# Altium PCB V1.pcbdoc
Units mil, origin at the board's own origin, x right, y up, seen from the top; angles counter-clockwise.
Board outline 2300.07 x 2074.8 mil, 2 copper layers (Top Layer, Bottom Layer); 52 components, 63 nets, 167 pads, 18 vias.
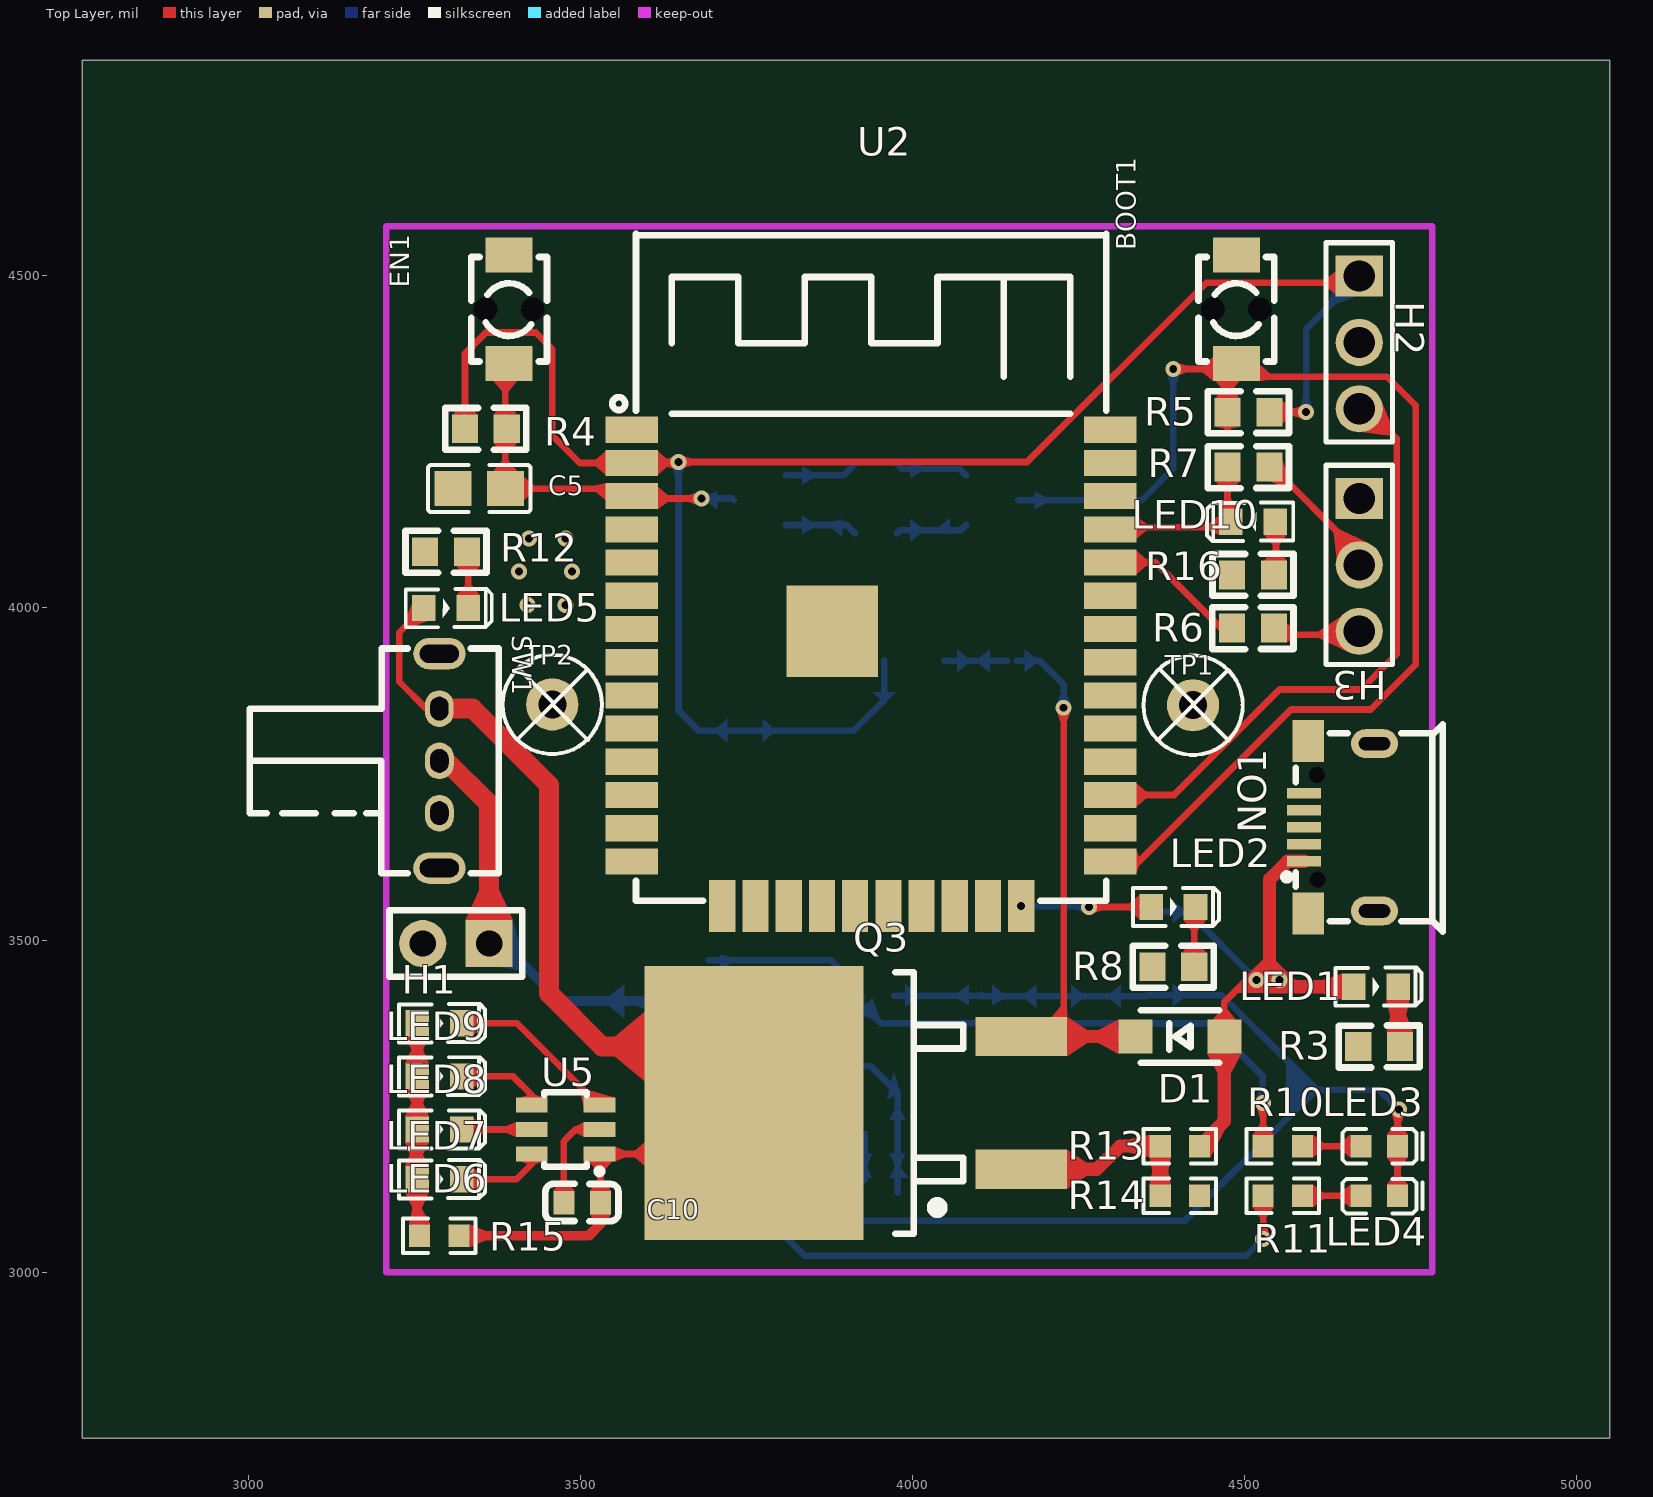
[diagram p0: Top Layer view]
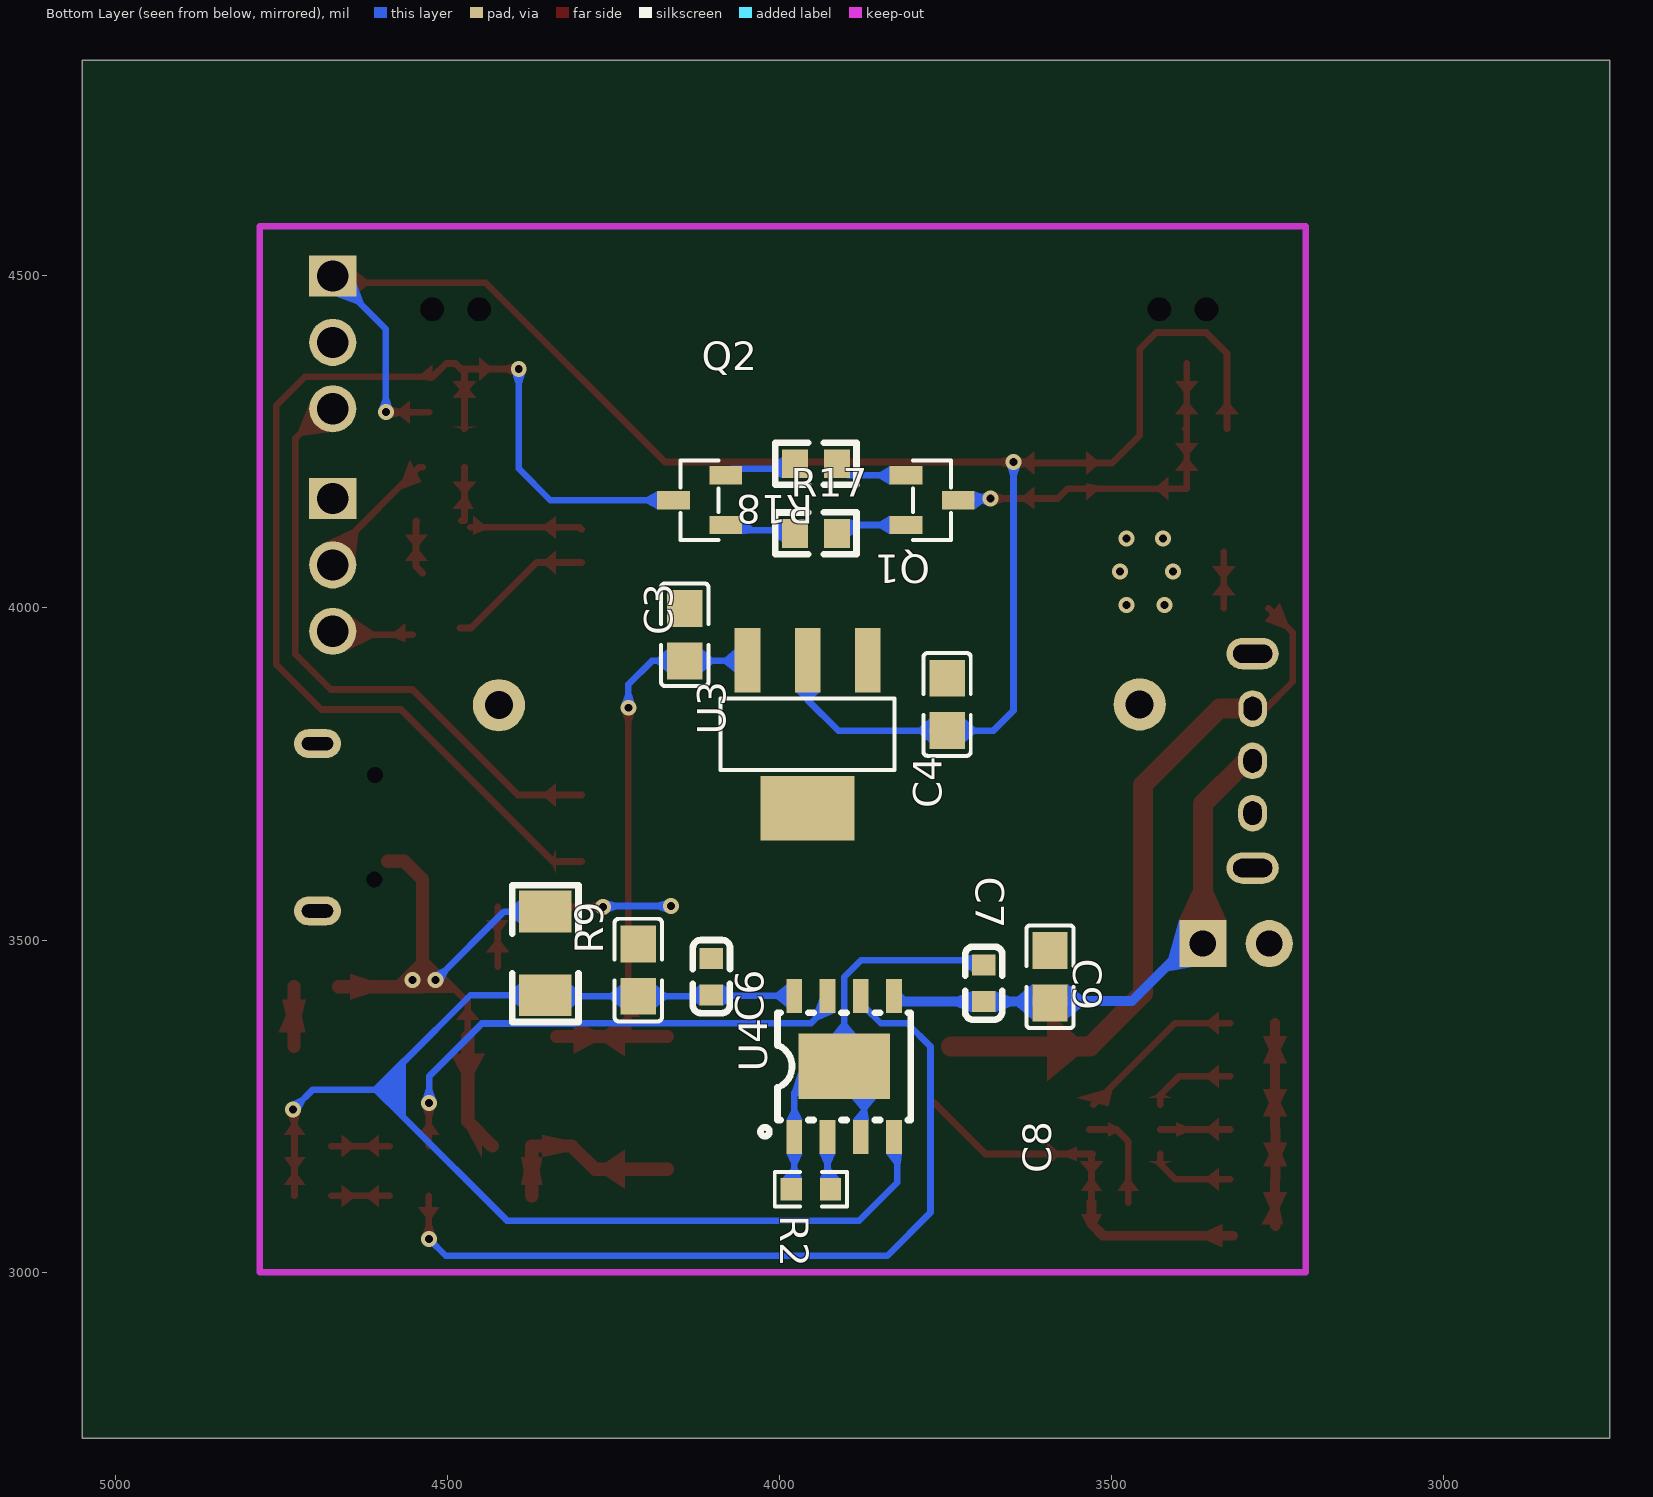
[diagram p1: Bottom Layer view, seen from below]

## Layer stack, top to bottom
Top Layer: signal copper (thickness not stored)
Dielectric: dielectric 12.6, FR-4, Dk 4.8
Bottom Layer: signal copper (thickness not stored)

## Board outline
5050.07,2750 2750,2750 2750,4824.8 5050.07,4824.8

## Components (designator, comment, footprint, x,y, rotation, side; value= is the part's Value field where it differs from the comment)
BOOT1 "TSA343G00D-250J2" SW-SMD_L4.0-W2.9-P4.15-EH 4487.79,4449.8 r90 top
C3 "10uF" C0805 4142.79,3959.8 r90 bottom
C4 "10uF" C0805 3747.79,3854.8 r90 bottom
C5 "10uF" C0805 3347.79,4179.8 r0 top
C6 "104" C0603 4102.79,3444.8 r270 bottom
C7 "104" C0603 3692.79,3434.8 r270 bottom
C8 "10UF" C0805 4212.79,3454.8 r270 bottom
C9 "10UF" C0805 3592.79,3444.8 r270 bottom
C10 "1uF" C0603 3502.79,3104.8 r0 top
D1 "1N4148W" SOD-123FL_L2.6-W1.6-LS3.4-RD 4402.79,3354.8 r180 top
EN1 "TSA343G00D-250J2" SW-SMD_L4.0-W2.9-P4.15-EH 3392.79,4449.8 r90 top
H1 "电源端口" HDR-TH_2P-P2.54-V-M-1 3312.79,3494.8 r180 top
H2 "Z-211-0311-0021-001" HDR-TH_3P-P2.54-V-M-1 4672.79,4399.8 r270 top
H3 "Z-211-0311-0021-001" HDR-TH_3P-P2.54-V-M-1 4672.79,4064.8 r270 top
LED1 "LED-0603_R" LED0603_RED 4697.79,3429.8 r0 top
LED2 "LED-0603_R" LED0603_RED 4392.79,3549.8 r0 top
LED3 "红色" L0603-RD 4702.79,3189.8 r180 top
LED4 "绿色" L0603-RD 4702.79,3114.8 r180 top
LED5 "LED-0603_R" LED0603_RED 3297.79,3999.8 r0 top
LED6 "LED-0603_R" LED0603_RED 3287.79,3139.8 r0 top
LED7 "LED-0603_R" LED0603_RED 3287.79,3214.8 r0 top
LED8 "LED-0603_R" LED0603_RED 3287.79,3294.8 r0 top
LED9 "LED-0603_R" LED0603_RED 3287.79,3374.8 r0 top
LED10 "LED-0603_R" LED0603_RED 4512.79,4129.8 r180 top
NO1 "MICROUSB-5PIN" USB-SMD_5P_MICROUSB-5PIN 4642.79,3669.8 r90 top
Q1 "S8050" SOT-23-3_L2.9-W1.3-P1.90-LS2.4-BR 3770.29,4162.3 r0 bottom
Q2 "S8050" SOT-23-3_L2.9-W1.3-P1.90-LS2.4-BR 4120.29,4162.3 r180 bottom
Q3 "IRF5210" TO-263-2_L10.0-W9.1-P5.08-LS15.2-BR 3962.79,3254.8 r0 top
R2 "1.2K" R0603#1 3952.79,3124.8 r180 bottom
R3 "1k" R0603#2 4702.79,3339.8 r180 top
R4 "10k" R0603#2 3357.79,4269.8 r180 top
R5 "10k" R0603#2 4505.96,4294.8 r0 top
R6 "120" R0603#2 4512.79,3969.8 r180 top
R7 "120" R0603#2 4505.99,4212.12 r180 top
R8 "1k" R0603#2 4392.82,3460 r180 top
R9 "250mR" R1206_1 4352.79,3479.8 r270 bottom
R10 "2K" R0603#1 4557.79,3189.8 r0 top
R11 "10k" R0603#1 4557.79,3114.8 r0 top
R12 "1k" R0603#2 3297.79,4084.8 r180 top
R13 "1k" R0603#1 4402.79,3189.8 r180 top
R14 "1k" R0603#1 4402.79,3114.8 r0 top
R15 "330" R0603#1 3287.79,3054.8 r180 top
R16 "1k" R0603#2 4512.79,4049.8 r0 top
R17 "10k" R0603#2 3945.29,4112.3 r180 bottom
R18 "10k" R0603#2 3945.29,4217.3 r0 bottom
SW1 "SK-12D02-VG5_C136722" SW-TH_SK-12D02-VG5 3287.79,3769.8 r270 top
TP1 "M2螺丝" M2螺丝 4422.6,3853.66 r0 top
TP2 "M2螺丝" M2螺丝 3457.79,3854.8 r0 top
U2 "ESP32-WROVER" COMM-SMD_ESP-WROOM-32D 3937.79,3909.8 r0 top
U3 "AMS1117-3.3_C347256" SOT-223-4_L6.5-W3.5-P2.30-LS7.0-BR 3957.79,3809.8 r90 bottom
U4 "TP4056D" ESOP-8_L4.9-W3.9-P1.27-LS6.0-TL-EP 3902.79,3309.8 r90 bottom
U5 "HM1160" SOT23-6 3477.79,3214.8 r90 top

## Footprints (in the part's own frame and the unit in brackets; to place one, negate y for a bottom-side part, rotate by r counter-clockwise, add the part's x,y. Pads: shape width x height; smd on the part's side, far side on the other; paste and mask are expansions set on the pad)
C0603 [mm]
  rect 0.8x0.9 smd paste+0 mask+0.051: 1(-0.7,0) 2(0.7,0)
  silkscreen extent -1.41,-0.71 1.39,0.72
C0805 [mm]
  rect 1.41x1.35 smd paste-100 mask+0.051: 1(-1,0) 2(1,0)
  silkscreen extent -1.96,-0.9 1.96,0.9
COMM-SMD_ESP-WROOM-32D [mm]
  rect 2x1.001 smd paste+0 mask+0.05: 1(-9.15,9.108) 2(-9.15,7.838) 3(-9.15,6.568) 4(-9.15,5.298) 5(-9.15,4.028) 6(-9.15,2.758) 7(-9.15,1.488) 8(-9.15,0.218) 9(-9.15,-1.052) 10(-9.15,-2.322) 11(-9.15,-3.592) 12(-9.15,-4.862) 13(-9.15,-6.132) 14(-9.15,-7.402) 25(9.15,-7.402) 26(9.15,-6.132) 27(9.15,-4.862) 28(9.15,-3.592) 29(9.15,-2.322) 30(9.15,-1.052) 31(9.15,0.218) 32(9.15,1.488) 33(9.15,2.758) 34(9.15,4.028) 35(9.15,5.298) 36(9.15,6.568) 37(9.15,7.838) 38(9.15,9.108)
  rect 1.001x2 smd paste+0 mask+0.05: 15(-5.69,-9.108) 16(-4.42,-9.108) 17(-3.15,-9.108) 18(-1.88,-9.108) 19(-0.61,-9.108) 20(0.66,-9.108) 21(1.93,-9.108) 22(3.2,-9.108) 23(4.47,-9.108) 24(5.74,-9.108)
  rect 3.5x3.5 smd paste+0 mask+0.05: 39(-1.491,1.399)
  silkscreen extent -9.9,-8.9 8.99,16.6
ESOP-8_L4.9-W3.9-P1.27-LS6.0-TL-EP [mm]
  rect 1.3x0.6 smd paste+0 mask+0.051: 1(-2.7,1.905) 2(-2.7,0.635) 3(-2.7,-0.635) 4(-2.7,-1.905) 5(2.7,-1.905) 6(2.7,-0.635) 7(2.7,0.635) 8(2.7,1.905)
  rect 2.5x3.5 smd paste+0 mask+0.051: 9(0,0)
  silkscreen extent -2.67,-2.55 2.05,3.2
HDR-TH_2P-P2.54-V-M-1 [mm]
  rect 1.8x1.8 hole 1 paste+0 mask+0.051: 1(-1.27,0)
  round 1.8 hole 1 paste+0 mask+0.051: 2(1.27,0)
  silkscreen extent -2.54,-1.27 2.54,1.27
HDR-TH_3P-P2.54-V-M-1 [mm]
  rect 1.575x1.8 hole 1.2 paste+0 mask+0.051: 1(-2.54,0)
  round 1.8 hole 1.2 paste+0 mask+0.051: 2(0,0) 3(2.54,0)
  silkscreen extent -3.81,-1.27 3.81,1.27
L0603-RD [mm]
  rect 0.8x0.864 smd paste-100 mask+0.051: 1(-0.7,0) 2(0.7,0)
  silkscreen extent -1.65,-0.65 1.41,0.67
LED0603_RED [mm]
  rect 0.9x1 smd paste+0 mask+0.051: 1(-0.85,0) 2(0.85,0)
  silkscreen extent -1.54,-0.73 1.75,0.73
M2螺丝 [mm]
  round 2 hole 1.07 mask+0.051: 1(0,0)
  silkscreen extent -1.9,-1.9 1.9,1.9
R0603#1 [mil]
  rect 31.75x34.02 smd paste-3937.01 mask+2: 1(-29.66,0) 2(29.66,0)
  silkscreen extent -55,-26 55,26
R0603#2 [mil]
  rect 39.37x43.31 smd paste+0 mask+4: 1(-31.49,0) 2(31.5,0)
  silkscreen extent -61,-31 61,32
R1206_1 [mil]
  rect 63x78.74 smd paste+0 mask+1.97: 1(-62.99,0) 2(62.99,0)
  silkscreen extent -103,-50 103,50
SOD-123FL_L2.6-W1.6-LS3.4-RD [mm]
  rect 1.3x1.3 smd paste+0 mask+0.051: 1(1.7,0) 2(-1.7,0)
  silkscreen extent -1.5,-1 1.5,1
SOT23-6 [mil]
  rect 22.2x47.7 smd paste+0 mask+2: 1(-37,-51) 2(0,-51) 3(37,-51) 4(37,51) 5(0,51) 6(-37,51)
  silkscreen extent -67,-55 56,32
SOT-23-3_L2.9-W1.3-P1.90-LS2.4-BR [mm]
  rect 1.25x0.7 smd paste+0 mask+0.051: 1(1,-0.95) 2(1,0.95) 3(-1,0)
  silkscreen extent -0.73,-1.53 0.73,1.53
SOT-223-4_L6.5-W3.5-P2.30-LS7.0-BR [mm]
  rect 2.47x0.98 smd paste+0 mask+0.051: 1(2.835,-2.3) 2(2.835,0) 3(2.835,2.3)
  rect 2.47x3.6 smd paste+0 mask+0.051: 4(-2.835,0)
  silkscreen extent -1.37,-3.33 1.37,3.33
SW-SMD_L4.0-W2.9-P4.15-EH [mm]
  rect 1.35x1.8 smd paste+0 mask+0.051: 1(-2.075,0) 2(2.075,0)
  Multi-Layer board cut-out: 0,0.45 0.195,0.494 0.352,0.619 0.439,0.8 0.439,1 0.352,1.18 0.195,1.305 0,1.35 0,1.35 -0.195,1.305 -0.352,1.18 -0.439,1 -0.439,0.8 -0.352,0.619 -0.195,0.494 0,0.45
  Multi-Layer board cut-out: 0,-1.35 0.195,-1.305 0.352,-1.18 0.439,-1 0.439,-0.8 0.352,-0.619 0.195,-0.494 0,-0.45 0,-0.45 -0.195,-0.494 -0.352,-0.619 -0.439,-0.8 -0.439,-1 -0.352,-1.18 -0.195,-1.305 0,-1.35
  silkscreen extent -2,-1.45 2,1.45
SW-TH_SK-12D02-VG5 [mm]
  oval 1.4x1.1 hole 0.7 slot 0.9 at 0 deg copper offset 0.001,0 paste+0 mask+0.051: 1(-2,-0.001)
  oval 1.4x1.1 hole 0.7 slot 0.9 at 0 deg paste+0 mask+0.051: 2(0,0)
  oval 1.4x1.1 hole 0.7 slot 0.9 at 0 deg copper offset -0.001,0 paste+0 mask+0.051: 3(2,0.001)
  oval 1.2x2 hole 0.7 slot 1.5 at 90 deg copper offset 0,-0.001 paste+0 mask+0.051: 4(4.099,0)
  oval 1.2x2 hole 0.7 slot 1.5 at 90 deg copper offset 0,0 paste+0 mask+0.051: 5(-4.1,0)
  silkscreen extent -4.3,-7.25 4.3,2.27
TO-263-2_L10.0-W9.1-P5.08-LS15.2-BR [mm]
  rect 3.504x1.5 smd paste+0 mask+0.102: 1(5.106,-2.54) 3(5.106,2.54)
  rect 8.38x10.49 smd paste+0 mask+0.102: 4(-5.106,0)
  silkscreen extent 0.29,-5 2.89,5
USB-SMD_5P_MICROUSB-5PIN [mm]
  rect 0.4x1.3 smd paste-100 mask+0.05: 1(-1.3,1.345) 2(-0.65,1.345) 3(0,1.345) 4(0.65,1.345) 5(1.3,1.345)
  rect 1.6x1.2 smd paste-100 mask+0.05: 6(3.3,1.185) 7(-3.3,1.185)
  oval 1.1x1.8 hole 0.5 slot 1.2 at 90 deg paste+0 mask+0.05: 8(3.2,-1.345) 9(-3.2,-1.345)
  Multi-Layer board cut-out: 2,0.555 2.13,0.585 2.235,0.668 2.292,0.788 2.292,0.922 2.235,1.042 2.13,1.125 2,1.155 2,1.155 1.87,1.125 1.765,1.042 1.708,0.922 1.708,0.788 1.765,0.668 1.87,0.585 2,0.555
  Multi-Layer board cut-out: -2,0.525 -1.87,0.555 -1.765,0.638 -1.708,0.758 -1.708,0.892 -1.765,1.012 -1.87,1.095 -2,1.125 -2,1.125 -2.13,1.095 -2.235,1.012 -2.292,0.892 -2.292,0.758 -2.235,0.638 -2.13,0.555 -2,0.525
  silkscreen extent -3.99,-3.96 3.93,2.14

## Via types
v1: diameter 24, hole 12, Top Layer to Bottom Layer, 18 vias

## Nets (pads, with @x,y where several pads share a name; then routed paths per layer and width w, separated by ;. In a path a pad name is that pad's centre, name@x,y a point inside that pad or via, vN(x,y) a via of type N, cw(c..) or ccw(c..) an arc to the next point about the centre after c; other vN are vias at no path point)
3V3: C4.1 H2.1 R4.2 R5.2 U2.2 U3.2 | length 2826.4
  Top Layer w10: R4.2 3326.29,4383.31 3357.79,4414.8 3432.79,4414.8 3457.79,4389.8 3457.79,4259.8 3499.2,4218.39 U2.2 3646.38,4218.39 v1(3647.79,4219.8) 4172.79,4219.8 4442.79,4489.8 4662.79,4489.8 H2.1 ; R5.2@4527.46,4294.81 v1(4592.79,4294.8)
  Bottom Layer w10: v1(3647.79,4219.8) 3647.79,3845.43 3677.79,3815.43 C4.1 3911.81,3815.43 3957.79,3861.41 U3.2 ; v1(4592.79,4294.8) 4592.79,4419.8 H2.1
$1N349: R2.2 U4.2 | length 90.3
  Bottom Layer w10: R2.2@3912.79,3124.46 3927.79,3139.46 U4.2@3927.79,3208.51
$1N379: R10.1 U4.7 | length 767
  Top Layer w10: v1(4527.79,3254.8) 4528.13,3254.46 R10.1
  Bottom Layer w10: U4.7@3922.79,3416.1 3922.79,3404.8 3952.79,3374.8 4308.37,3374.8 4308.86,3374.31 4448.28,3374.31 4527.79,3294.8 v1(4527.79,3254.8)
$1N380: R11.1 U4.6 | length 1248.6
  Top Layer w10: v1(4527.79,3049.8) 4528.13,3050.14 R11.1
  Bottom Layer w10: U4.6@3872.79,3416.1 3872.79,3399.8 3847.79,3374.8 3807.79,3374.8 3772.79,3339.8 3772.79,3089.8 3837.79,3024.8 4502.79,3024.8 v1(4527.79,3049.8)
$1N662: Q3.1 R13.2 R14.1 | length 293.8
  Top Layer w20: Q3.1@4168.83,3154.8 4277.79,3154.8 4312.79,3189.8 R13.2 R14.1
$1N691: LED9.2 U5.3 | length 257.5
  Top Layer w10: LED9.2 3404.8,3374.8 U5.3@3527.79,3251.81
$1N692: LED8.2 U5.4 | length 132.1
  Top Layer w10: LED8.2 3398.79,3294.8 3426.79,3266.81 U5.4
$1N693: LED7.2 U5.5 | length 105.5
  Top Layer w10: LED7.2 U5.5
$1N694: LED6.2 U5.6 | length 130.1
  Top Layer w10: LED6.2 3403.78,3139.8 3426.79,3162.81 U5.6
$1N695: LED6.1 LED7.1 LED8.1 LED9.1 R15.2 | length 306.5
  Top Layer w15: R15.2@3253.13,3069.8 3254.32,3070.99 LED6.1 3253.13,3140.99 LED7.1@3253.13,3214.8 ; LED7.1@3253.13,3215.99 LED7.1 ; LED7.1@3254.32,3215.99 LED8.1 LED9.1
$1N772: H3.3 R6.1 | length 122.4
  Top Layer w10: R6.1@4552.48,3959.8 4667.79,3959.8 H3.3
$1N773: H3.2 R7.1 | length 243.9
  Top Layer w10: R7.1 4542.48,4212.11 4663.44,4091.16 H3.2@4663.44,4086.16 ; H3.2@4663.44,4086.16 4663.44,4074.16 H3.2 4680.17,4064.8 4682.48,4067.11 H3.2@4663.44,4086.16
$1N829: LED10.1 R16.2 | length 83.7
  Top Layer w10: R16.2@4537.46,4052.49 4547.46,4062.49 4547.46,4130.38 LED10.1@4546.26,4131.57
$1N937: LED3.2 R10.2 | length 87.8
  Top Layer w10: R10.2 LED3.2
$1N938: LED4.2 R11.2 | length 87.8
  Top Layer w10: R11.2 LED4.2
$1N941: LED5.2 R12.1 | length 85
  Top Layer w10: LED5.2 R12.1@3331.25,4084.8
$1N948: Q2.1 R17.1 | length 109.4
  Bottom Layer w10: R17.1 3981.78,4117.31 4073.32,4117.31 Q2.1
$1N949: Q1.1 R18.1 | length 111.4
  Bottom Layer w10: Q1.1 3896.2,4199.7 R18.1
$1N2531: LED2.2 R8.1 | length 89.8
  Top Layer w10: R8.1 LED2.2@4424.31,3549.8
$1N2543: LED1.2 R3.1 | length 90
  Top Layer w20: R3.1@4731.25,3339.8 LED1.2
+5V: D1.2 LED1.1 NO1.1 R9.1 R13.1 | length 845.4
  Top Layer w10: D1.2 4469.72,3406.73 v1@4507.79,3444.8
  Top Layer w20: R13.1 4469.72,3227.07 D1.2 ; NO1.1 4564.84,3618.62 4537.79,3591.57 4537.79,3429.8 LED1.1
  Bottom Layer w10: R9.1 4414.8,3542.79 v1(4517.79,3439.8)
  other v1: 4552.79,3439.8
CLK: U2.20
CMD: U2.19
DTR: Q2.2 R18.2 | length 111.4
  Bottom Layer w10: R18.2 3984.39,4209.7 4070.92,4209.7 Q2.2
EN: C5.2 EN1.1 Q1.3 R4.1 U2.3 | length 540.2
  Top Layer w10: R4.1@3387.16,4269.8 C5.2 3566.14,4179.8 U2.3 3581.14,4164.8 v1(3682.79,4164.8) ; EN1.1@3387.16,4368.11 3387.16,4271.92 R4.1
  Bottom Layer w10: v1(3682.79,4164.8) 3728.42,4164.8 Q1.3
GND: BOOT1.2 C3.2 C4.2 C5.1 C6.1 C7.1 C8.1 C9.1 C10.1 EN1.2 H1.2 H2.2 H3.1 NO1.5 NO1.6 NO1.7 NO1.8 NO1.9 R2.1 R3.2 R8.2 R12.2 R14.2 U2.1 U2.15 U2.38 U2.39 U3.1 U4.1 U4.3 U4.9 U5.2 | length 861.4
  Top Layer w10: C10.1 3475.23,3197.24 3492.79,3214.8 U5.2@3533.79,3214.8
  Bottom Layer w10: C7.1@3692.79,3469.8 3877.05,3469.8 3902.8,3444.05 U4.9 3937.8,3309.8 3977.79,3269.81 U4.1 R2.1@3977.79,3119.46 ; U4.3@3872.79,3203.51 U4.9@3872.79,3309.8
  other v1: 3420.41,4004.8 3477.79,4004.8 3407.79,4054.8 3487.79,4054.8 3422.79,4104.8 3477.79,4104.8
IO0: BOOT1.1 Q2.3 R5.1 U2.25 | length 1862.1
  Top Layer w10: U2.25 4341.38,3618.39 4570.21,3847.22 4690.21,3847.22 4757.79,3914.8 4757.79,4304.8 4714.22,4348.37 4521.68,4348.37 4501.93,4368.11 BOOT1.1 BOOT1.1@4479.48,4359.8 ; v1(4392.79,4359.8) BOOT1.1@4479.48,4359.8 ; 4474.47,4269.81 R5.1 4474.47,4354.79 BOOT1.1@4479.48,4359.8
  Bottom Layer w10: Q2.3 4345.29,4162.3 4392.79,4209.8 v1(4392.79,4359.8)
IO2: LED2.1 U2.24 | length 196.1
  Top Layer w10: v1(4266.23,3549.8) LED2.1
  Bottom Layer w10: v1(4163.79,3551.21) 4264.82,3551.21 v1(4266.23,3549.8)
IO4: U2.26
IO5: U2.29
IO12: U2.14
IO13: U2.16
IO14: U2.13
IO15: U2.23
IO16: H2.3 U2.27 | length 918.7
  Top Layer w10: U2.27 4394.14,3718.39 4552.96,3877.22 4675.87,3877.22 4729.22,3930.57 4729.22,4255.36 4684.78,4299.8 H2.3
IO17: U2.28
IO18: U2.30
IO19: U2.31
IO21: U2.33
IO22: U2.36
IO23: U2.37
IO25: U2.10
IO26: U2.11
IO27: U2.12
IO32: U2.8
IO33: U2.9
IO34: U2.6
IO35: U2.7
RTS: Q1.2 R17.2 | length 109.3
  Bottom Layer w10: Q1.2 3901.2,4124.9 R17.2
RXD0: R6.2 U2.34 | length 224.1
  Top Layer w10: U2.34 4365.9,4068.39 4464.49,3969.8 R6.2
SD0: U2.21
SD1: U2.22
SD2: U2.17
SD3: U2.18
SVN: U2.5
SVP: U2.4
TXD0: LED10.2 R7.2 U2.35 | length 254.5
  Top Layer w10: U2.35 4301.21,4121.57 LED10.2@4465.85,4121.57 ; R7.2 4474.49,4131.57 LED10.2@4479.33,4131.57
VCC3V3: R16.1
VCC4: C6.2 C8.2 LED3.1 LED4.1 R9.2 U4.4 U4.8 | length 1922.2
  Top Layer w10: LED4.1 LED3.1 4730.35,3242.36 v1(4732.79,3244.8)
  Bottom Layer w10: U4.4@3822.79,3203.51 3822.79,3134.8 3880.01,3077.59 4410.58,3077.59 4567.79,3234.8 4567.79,3274.8 ; U4.8@3972.79,3416.1 4101.65,3416.1 C6.2 ; C6.2@4102.79,3415.43 C8.2 4351.41,3415.43 R9.2 4465.78,3416.81 4567.79,3314.8 4567.79,3274.8 ; v1@4727.79,3249.8 4702.79,3274.8 4567.79,3274.8
VCCBAT: C10.2 LED5.1 Q3.4 R15.1 SW1.1 U5.1 | length 1647.2
  Top Layer w10: LED5.1 3227.42,3962.9 3227.42,3888.91 3267.79,3848.54 SW1.1@3297.79,3848.54 ; U5.1 U5.1@3530.35,3177.81 ; C10.2 U5.1@3530.35,3177.81 ; Q3.4@3766.75,3254.81 3689.74,3177.81 U5.1@3530.35,3177.81
  Top Layer w15: R15.1 3512.79,3054.8 3530.35,3072.36 C10.2
  Top Layer w30: SW1.1@3297.79,3848.54 3337.79,3848.54 3452.79,3733.54 3452.79,3419.8 3532.79,3339.8 Q3.4@3741.75,3339.8
VCCCHARGE: C7.2 C9.2 H1.1 SW1.2 U4.5 | length 802.6
  Top Layer w30: SW1.2@3297.79,3769.79 3362.79,3704.79 H1.1
  Bottom Layer w15: H1.1 3382.79,3494.8 3469.37,3408.22 3590,3408.22 C9.2 ; C9.2@3592.79,3407.24 C7.2 3813.93,3407.24 U4.5@3822.79,3416.1
VCCIN: C3.1 D1.1 Q3.3 U3.3 | length 878.9
  Top Layer w10: Q3.3@4222.79,3354.8 4227.79,3359.8 v1(4227.79,3849.8)
  Top Layer w20: Q3.3@4168.83,3354.8 4222.79,3354.8 D1.1
  Bottom Layer w10: U3.3@4048.34,3920.43 C3.1 ; C3.1@4157.16,3920.43 4192.16,3920.43 4227.79,3884.8 v1(4227.79,3849.8)
"": NO1.2 NO1.3 NO1.4 SW1.3 SW1.4 SW1.5 TP1.1 TP2.1 U2.32 U3.4

## Keep-outs
Board Outline Layer:
  lines w10 net "": 3207.79,3000 4782.59,3000 4782.59,4574.8 3207.79,4574.8 3207.79,3000

## Other copper
Top Layer:
  region net +5V: 4476.63,3419.8 4536.28,3479.46 4536.75,3479.46 4572.07,3444.13 4598.62,3420.39
  region net +5V: 4464.72,3395.39 4452.22,3380.39 4487.22,3380.39 4474.72,3395.39
  region net +5V: 4459.72,3299.21 4479.72,3299.21 4495.31,3329.21 4444.13,3329.21
  region net VCCIN: 4280.27,3344.8 4310.27,3329.21 4310.27,3380.39 4280.27,3364.8
  region net VCCCHARGE: 3377.79,3575.24 3347.79,3575.24 3327.36,3530.24 3398.22,3530.24
  region net IO16: 4679.1,4264.94 4718.51,4259 4723.84,4267.81 4706.6,4310.42
  region net 3V3: 4622.36,4494.8 4622.36,4484.8 4637.36,4472.3 4637.36,4507.3
  region net $1N772: 4645.84,3987.8 4611.95,3964.8 4613.37,3954.8 4653.34,3935.18
  region net $1N773: 4686.87,4097.32 4643.89,4117.78 4634.27,4113.25 4638.77,4074.71
  region net $1N2543: 4741.25,3380.12 4748.97,3410.12 4713.54,3410.12 4721.25,3380.12
  region net +5V: 4616.61,3439.8 4616.61,3419.8 4646.61,3410.12 4646.61,3449.49
  region net $1N2531: 4419.31,3515.12 4429.31,3515.12 4441.81,3530.12 4408.54,3530.12
  region net IO2: 4326.61,3544.8 4341.61,3532.3 4341.61,3567.3 4326.61,3554.8
  region net $1N941: 3326.25,4034.49 3313.75,4019.49 3348.75,4019.49 3336.25,4034.49
  region net VCCBAT: 3236,3978.55 3241.1,3969.51 3269.38,3980.12 3246.61,4006.84
  region net TXD0: 4446.62,4116.57 4461.62,4110.12 4461.62,4139.07 4446.62,4126.57
  region net TXD0: 4479.49,4164.49 4469.49,4164.49 4461.62,4149.49 4491.99,4149.49
  region net $1N829: 4542.46,4095.12 4552.46,4095.12 4563.98,4110.12 4529.96,4110.12
  region net VCCBAT: 3581.79,3182.81 3581.79,3172.81 3596.79,3160.31 3596.79,3195.31
  region net VCCBAT: 3551.79,3324.8 3596.79,3287.3 3596.79,3392.3 3551.79,3354.8
  region net VCCIN: 4222.79,3399.33 4210.29,3384.33 4232.81,3384.33 4232.79,3399.33
  region net VCCIN: 4262.81,3344.8 4262.81,3364.8 4232.81,3384.33 4232.81,3325.28
  region net $1N662: 4262.81,3144.8 4262.81,3164.8 4232.81,3184.33 4232.81,3125.28
  region net $1N2543: 4741.25,3391.45 4721.25,3391.45 4714.6,3361.45 4753.97,3361.45
  region net 3V3: 3331.29,4306.45 3321.29,4306.45 3308.79,4291.45 3343.79,4291.45
  region net EN: 3382.16,4306.45 3369.66,4291.45 3404.66,4291.45 3392.16,4306.45
  region net EN: 3382.16,4233.15 3392.16,4233.15 3404.66,4248.15 3369.66,4248.15
  region net 3V3: 4572.15,4289.81 4572.15,4299.81 4557.15,4312.31 4557.15,4277.31
  region net IO0: 4469.47,4269.81 4479.47,4269.81 4491.97,4273.15 4456.97,4273.15
  region net IO0: 4469.47,4331.46 4456.97,4316.46 4491.97,4316.46 4479.47,4331.46
  region net $1N772: 4578.97,3954.8 4578.97,3964.8 4563.97,3977.3 4563.97,3948.15
  region net TXD0: 4479.49,4175.46 4491.99,4190.46 4456.99,4190.46 4469.49,4175.46
  region net $1N773: 4567.77,4193.89 4557.16,4222.18 4539.38,4190.46 4567.67,4179.85
  region net $1N2531: 4419.31,3496.65 4406.81,3481.65 4441.81,3481.65 4429.31,3496.65
  region net $1N941: 3326.25,4048.15 3336.25,4048.15 3348.75,4063.15 3313.75,4063.15
  region net $1N829: 4542.46,4086.46 4529.96,4071.46 4563.97,4071.46 4552.46,4086.46
  region net $1N662: 4363.13,3142.8 4383.13,3142.8 4389.01,3172.8 4357.26,3172.8
  region net $1N662: 4327.26,3179.8 4357.26,3172.8 4357.26,3206.81 4327.26,3199.8
  region net +5V: 4456.53,3228.02 4448.33,3206.81 4448.33,3172.8 4469.54,3212.75
  region net $1N662: 4363.13,3161.81 4357.26,3131.81 4389.01,3131.81 4383.13,3161.81
  region net $1N695: 3246.82,3094.31 3242.26,3071.81 3274.01,3071.81 3261.82,3094.31
  region net VCCBAT: 3355.83,3062.3 3333.33,3071.81 3333.33,3037.8 3355.83,3047.3
  region net VCCBAT: 3525.35,3151.71 3535.35,3151.71 3547.85,3166.71 3512.85,3166.71
  region net VCCBAT: 3567.64,3182.81 3552.64,3188.91 3552.64,3166.71 3567.64,3172.81
  region net GND: 3492.79,3209.8 3504.94,3203.71 3504.94,3225.91 3492.79,3219.8
  region net $1N691: 3499.01,3273.51 3504.94,3249.91 3552.64,3262.91 3513.16,3273.51
  region net $1N692: 3421.79,3266.81 3409.29,3262.91 3444.29,3262.91 3431.79,3266.81
  region net $1N694: 3431.79,3162.81 3444.29,3166.71 3409.29,3166.71 3421.79,3162.81
  region net $1N693: 3387.94,3209.8 3402.94,3203.71 3402.94,3225.91 3387.94,3219.8
  region net TXD0: 4352.4,4116.57 4352.4,4126.57 4337.4,4138.09 4337.4,4104.07
  region net RXD0: 4352.4,4063.39 4352.4,4073.39 4337.4,4085.89 4337.4,4050.89
  region net 3V3: 3631.92,4213.39 3631.92,4223.39 3616.92,4235.89 3616.92,4200.89
  region net 3V3: 3523.18,4213.39 3538.18,4200.89 3538.18,4235.89 3523.18,4223.39
  region net EN: 3523.18,4174.8 3538.18,4162.3 3538.18,4188.09 3523.18,4184.8
  region net EN: 3631.92,4159.8 3631.92,4169.8 3616.92,4182.3 3616.92,4148.69
  region net IO16: 4352.4,3713.39 4352.4,3723.39 4337.4,3735.89 4337.4,3700.89
  region net IO0: 4341.38,3623.39 4337.4,3635.89 4337.4,3600.89 4341.38,3613.39
  region net $1N937: 4644.48,3184.8 4659.48,3172.8 4659.48,3206.81 4644.48,3194.8
  region net VCC4: 4735.35,3157.8 4746.1,3172.8 4714.6,3172.8 4725.35,3157.8
  region net VCC4: 4725.35,3221.81 4714.6,3206.81 4746.1,3206.81 4735.35,3221.81
  region net $1N937: 4618.33,3184.8 4618.33,3194.8 4603.33,3206.81 4603.33,3172.8
  region net $1N379: 4533.13,3221.81 4523.13,3221.81 4512.26,3206.81 4544.01,3206.81
  region net $1N938: 4644.48,3109.8 4659.48,3097.8 4659.48,3131.81 4644.48,3119.8
  region net VCC4: 4735.35,3146.81 4725.35,3146.81 4714.6,3131.81 4746.1,3131.81
  region net $1N938: 4618.33,3109.8 4618.33,3119.8 4603.33,3131.81 4603.33,3097.8
  region net $1N380: 4523.13,3082.8 4533.13,3082.8 4544.01,3097.8 4512.26,3097.8
  region net $1N694: 3353.97,3134.8 3353.97,3144.8 3338.97,3157.3 3338.97,3122.3
  region net $1N695: 3246.82,3097.62 3261.82,3097.62 3272.04,3120.12 3236.61,3120.12
  region net $1N695: 3245.63,3181.99 3236.61,3159.49 3272.04,3159.49 3260.63,3181.99
  region net $1N693: 3353.97,3209.8 3353.97,3219.8 3338.97,3232.3 3338.97,3197.3
  region net $1N695: 3245.63,3172.62 3260.63,3172.62 3272.04,3195.12 3236.61,3195.12
  region net $1N695: 3246.82,3256.99 3236.61,3234.49 3272.04,3234.49 3261.82,3256.99
  region net $1N692: 3353.97,3289.8 3353.97,3299.8 3338.97,3312.3 3338.97,3277.3
  region net $1N695: 3246.82,3336.99 3236.61,3314.49 3272.04,3314.49 3261.82,3336.99
  region net $1N695: 3246.82,3252.62 3261.82,3252.62 3272.04,3275.12 3236.61,3275.12
  region net $1N691: 3353.97,3369.8 3353.97,3379.8 3338.97,3392.3 3338.97,3357.3
  region net $1N695: 3246.82,3332.62 3261.82,3332.62 3272.04,3355.12 3236.61,3355.12
  region net EN: 3429.92,4174.8 3429.92,4184.8 3414.92,4197.3 3414.92,4162.3
  region net EN: 3382.16,4221.38 3369.66,4206.38 3404.66,4206.38 3392.16,4221.38
  region net VCCBAT: 3522.85,3072.36 3537.85,3072.36 3546.1,3087.09 3514.6,3087.09
  region net VCCBAT: 3525.35,3137.52 3514.6,3122.52 3546.1,3122.52 3535.35,3137.52
  region net GND: 3480.23,3137.52 3470.23,3137.52 3459.48,3122.52 3490.98,3122.52
  region net IO0: 4469.47,4326.54 4479.47,4326.54 4491.97,4341.54 4456.97,4341.54
  region net IO0: 4437.36,4354.8 4452.36,4342.3 4452.36,4377.3 4437.36,4364.8
  region net IO0: 4538.22,4343.37 4538.22,4353.37 4523.22,4365.87 4523.22,4341.54
  region net EN: 3382.16,4326.54 3392.16,4326.54 3404.66,4341.54 3369.66,4341.54
  region net $1N379: 4519.02,3246.61 4523.13,3234.26 4533.13,3234.55 4537.01,3247.12
  region net $1N380: 4537.01,3057.48 4533.13,3070.06 4523.13,3070.34 4519.02,3057.99
  region net VCCIN: 4218.79,3841.87 4222.79,3829.4 4232.79,3829.4 4236.79,3841.87
  region net 3V3: 3638.85,4227.81 3626.82,4223.39 3628.01,4213.39 3640.97,4209.93
  region net 3V3: 3655.73,4210.8 3668.19,4214.8 3668.19,4224.8 3655.73,4228.8
  region net EN: 3674.85,4173.8 3662.39,4169.8 3662.39,4159.8 3674.85,4155.8
  region net IO0: 4400.73,4350.8 4413.19,4354.8 4413.19,4364.8 4400.73,4368.8
  region net 3V3: 4584.86,4303.81 4572.39,4299.81 4572.39,4289.81 4584.85,4285.81
  region net VCC4: 4722.37,3238.86 4725.35,3225.51 4735.35,3223.44 4739.99,3235.2
  region net IO2: 4274.17,3540.8 4286.63,3544.8 4286.63,3554.8 4274.17,3558.8
Bottom Layer:
  region net VCC4: 4567.79,3321.93 4567.79,3227.72 4614.88,3274.8 4615.38,3274.8 4568.26,3321.93
  region net VCCCHARGE: 3652.57,3399.74 3675.07,3391.5 3675.07,3422.99 3652.57,3414.74
  region net VCCCHARGE: 3733.01,3399.74 3733.01,3414.74 3710.51,3422.99 3710.51,3391.5
  region net GND: 3725.51,3474.8 3710.51,3478.11 3710.51,3452.3 3725.51,3464.8
  region net VCC4: 4171.22,3410.43 4186.22,3397.93 4186.22,3432.93 4171.22,3420.43
  region net VCC4: 4254.37,3410.43 4254.37,3420.43 4239.37,3432.93 4239.37,3397.93
  region net VCCCHARGE: 3641.87,3399.74 3641.87,3414.74 3619.37,3433.19 3619.37,3380.99
  region net VCCCHARGE: 3543.72,3400.72 3566.22,3381.97 3566.22,3433.19 3543.72,3415.72
  region net VCC4: 4070.07,3411.1 4085.07,3401.5 4085.07,3432.99 4070.07,3421.1
  region net VCC4: 4135.51,3410.43 4135.51,3420.43 4120.51,3432.93 4120.51,3401.5
  region net VCCCHARGE: 3414.13,3452.85 3414.13,3474.07 3398.22,3530.24 3381.1,3459.37
  region net 3V3: 4626.75,4460.83 4638.26,4458.2 4666.54,4468.8 4637.36,4489.12
  region net 3V3: 3962.79,3861.41 3975.29,3872.79 3940.29,3872.79 3952.79,3861.41
  region net VCCIN: 4082.63,3915.43 4082.63,3925.43 4067.63,3937.93 4067.63,3902.93
  region net 3V3: 3706.22,3820.43 3706.22,3810.43 3721.22,3797.93 3721.22,3832.93
  region net 3V3: 3789.37,3810.43 3789.37,3820.43 3774.37,3832.93 3774.37,3797.93
  region net VCCIN: 4101.22,3915.43 4116.22,3902.93 4116.22,3937.93 4101.22,3925.43
  region net VCCIN: 4184.37,3925.43 4169.37,3937.93 4169.37,3902.93 4184.37,3915.43
  region net $1N949: 3849.27,4204.7 3834.27,4213.48 3834.27,4185.92 3849.27,4194.7
  region net RTS: 3849.27,4119.9 3849.27,4129.9 3834.27,4138.68 3834.27,4111.12
  region net EN: 3691.31,4169.8 3691.31,4159.8 3706.31,4148.52 3706.31,4176.08
  region net $1N948: 4041.31,4112.31 4056.31,4111.12 4056.31,4134.81 4041.31,4122.31
  region net IO0: 4199.27,4167.3 4184.27,4176.08 4184.27,4148.52 4199.27,4157.3
  region net RTS: 3879.11,4119.9 3894.11,4107.4 3894.11,4133.96 3879.11,4129.9
  region net $1N948: 4011.47,4112.31 4011.47,4122.31 3996.47,4133.96 3996.47,4099.81
  region net DTR: 4011.47,4204.7 4011.47,4214.7 3996.47,4227.2 3996.47,4195.65
  region net +5V: 4407.16,3547.79 4392.16,3560.29 4392.16,3525.29 4407.16,3537.79
  region net VCC4: 4298.42,3410.43 4313.42,3397.93 4313.42,3432.93 4298.42,3420.43
  region net VCC4: 4407.16,3421.81 4392.16,3434.31 4392.16,3399.31 4407.16,3411.81
  region net GND: 3972.79,3244.1 3965.98,3229.1 3989.6,3229.1 3982.79,3244.1
  region net GND: 3972.79,3162.92 3982.79,3162.92 3989.6,3177.92 3965.98,3177.92
  region net $1N349: 3932.79,3162.92 3939.6,3177.92 3915.98,3177.92 3922.79,3162.92
  region net GND: 3867.79,3244.1 3865.98,3229.1 3889.6,3229.1 3877.79,3244.1
  region net VCC4: 3817.79,3162.92 3827.79,3162.92 3839.6,3177.92 3815.98,3177.92
  region net $1N379: 3940.62,3379.91 3950.21,3384.46 3939.6,3412.74 3915.98,3390.51
  region net VCC4: 4004.6,3411.1 4004.6,3421.1 3989.6,3433.6 3989.6,3398.6
  region net GND: 3867.79,3245.59 3877.79,3245.59 3890.29,3260.59 3855.29,3260.59
  region net GND: 3974.26,3266.28 3981.33,3273.35 3971.7,3300.65 3962.26,3260.59
  region net GND: 3897.8,3374.02 3885.3,3359.02 3920.3,3359.02 3907.8,3374.02
  region net $1N349: 3932.79,3156.81 3922.79,3156.81 3910.29,3141.81 3939.01,3141.81
  region net GND: 3972.79,3156.81 3966.58,3141.81 3995.29,3141.81 3982.79,3156.81
  region net +5V: 4518.54,3451.78 4506.9,3457.76 4499.83,3450.69 4505.81,3439.05
  region net $1N379: 4536.79,3262.74 4532.79,3275.2 4522.79,3275.2 4518.79,3262.74
  region net VCCIN: 4236.79,3857.74 4232.79,3870.2 4222.79,3870.2 4218.79,3857.74
  region net 3V3: 3638.79,4211.87 3642.79,4199.4 3652.79,4199.4 3656.79,4211.87
  region net EN: 3690.73,4155.8 3703.19,4159.8 3703.19,4169.8 3690.73,4173.8
  region net IO0: 4383.79,4351.87 4387.79,4339.4 4397.79,4339.4 4401.79,4351.87
  region net 3V3: 4601.79,4302.74 4597.79,4315.2 4587.79,4315.2 4583.79,4302.74
  region net VCC4: 4733.54,3256.78 4721.9,3262.76 4714.83,3255.69 4720.81,3244.05
  region net IO2: 4171.73,3542.21 4184.19,3546.21 4184.19,3556.21 4171.73,3560.21
  region net IO2: 4259.41,3559.67 4246.45,3556.21 4245.26,3546.21 4257.29,3541.8